# EAGLE board Remote Irbis (EAGLE 7.5.0)
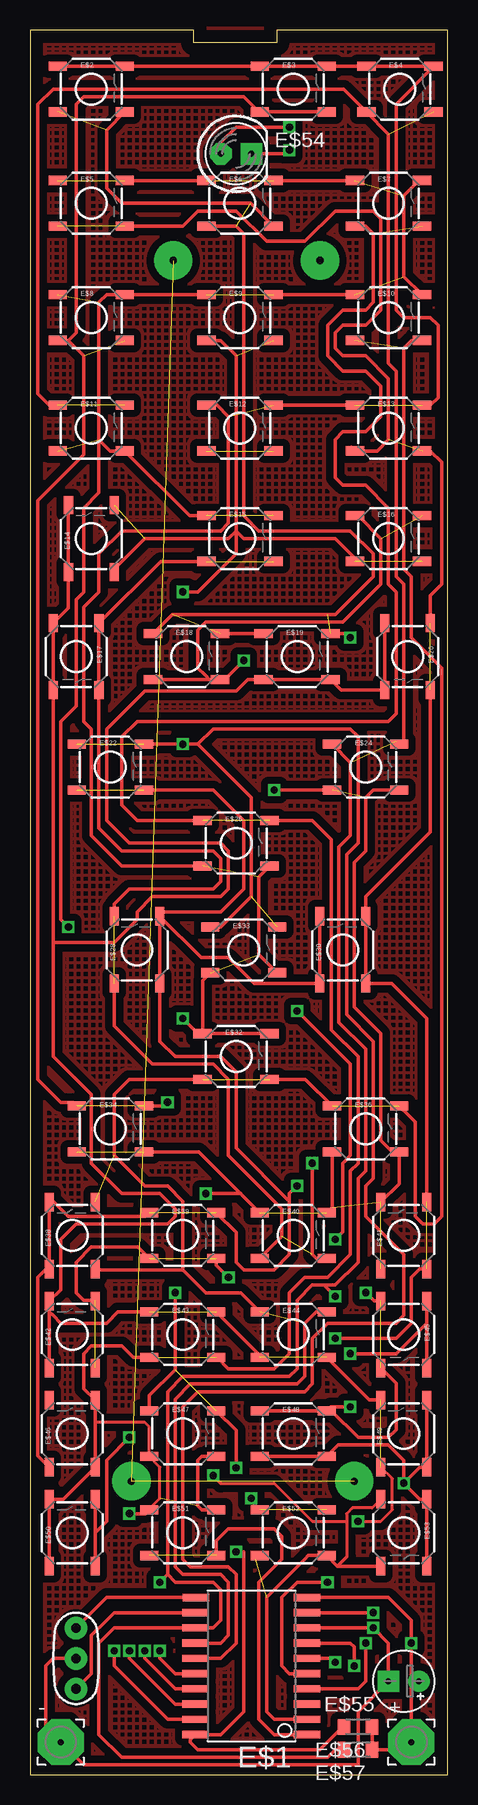
[diagram p0: board, top side]
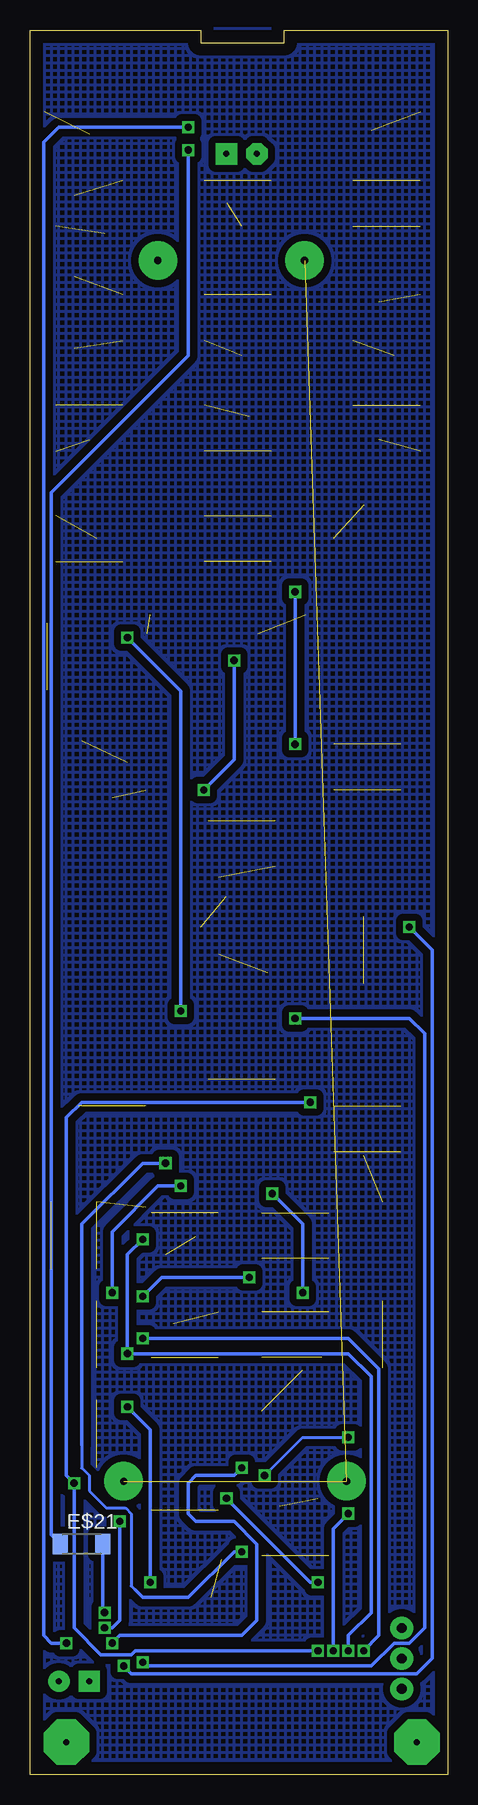
[diagram p1: board, bottom side, seen from below]

Size 34.82 x 145.44 mm. Coordinates in mm from the lower left corner, seen from the top.
Outline: 0,0 34.82,0
Outline: 34.82,0 34.82,145.44
Outline: 34.82,145.44 20.58,145.44
Outline: 20.58,145.44 20.58,144.36
Outline: 20.58,144.36 13.64,144.36
Outline: 13.64,144.36 13.64,145.44
Outline: 13.64,145.44 0,145.44
Outline: 0,145.44 0,0
Outline: 0,0 34.82,0
Outline: 34.82,0 34.82,145.44
Outline: 34.82,145.44 20.58,145.44
Outline: 20.58,145.44 20.58,144.36
Outline: 20.58,144.36 13.64,144.36
Outline: 13.64,144.36 13.64,145.44
Outline: 13.64,145.44 0,145.44
Outline: 0,145.44 0,0
Copper layers (1*16): Top 0.035mm / dielectric 1.5mm / Bottom 0.035mm
Design rules "default": minimum track width 10mil, minimum drill 24mil, track to track 8mil, track to pad 8mil, pad to pad 8mil, via to via 8mil, smd to smd 8mil, copper to edge 40mil, drill to drill 8mil, minimum pad ring 10mil, minimum via ring 8mil, stop-mask expansion 4mil, vias tented up to drill 0mil, thermal gap 10mil

## Footprints (pad centres in the part's own frame; a part is rotated, then mirrored left to right if it is on the bottom)
3,81/1,4 = drill 0.5 pad 3.81 octagon: 1 0,0
SO20L$ = smd 0.61 x 2.21: 1 -5.715,-4.636; 2 -4.445,-4.636; 3 -3.175,-4.636; 4 -1.905,-4.636; 5 -0.635,-4.636; 6 0.635,-4.636; 7 1.905,-4.636; 8 3.175,-4.636; 9 4.445,-4.636; 10 5.715,-4.636; 11 5.715,4.61; 12 4.445,4.636; 13 3.175,4.636; 14 1.905,4.636; 15 0.635,4.636; 16 -0.635,4.636; 17 -1.905,4.636; 18 -3.175,4.636; 19 -4.445,4.636; 20 -5.715,4.636
TACTILE-SWITCH-SMD = smd 1.524 x 0.762: 1 -2.794,1.905; 2 2.794,1.905; 3 -2.794,-1.905; 4 2.794,-1.905
R1206 = smd 1.25 x 1.7: 1 -1.775,0; 2 1.775,0
LED5MM = drill 0.5 pad 1.778 octagon: A -1.27,0 | drill 0.5 pad 1.778 square: K 1.27,0
E2,5-5 = drill 0.5 pad 1.778: + -1.27,0 | drill 0.5 pad 1.778 square: - 1.27,0
R0805 = smd 1.05 x 1.3: 1 -1.175,0; 2 1.175,0
RESONATOR-PTH = drill 0.8 pad 1.88: 1 -2.54,0; 2 0,0; 3 2.54,0

## Placement (x,y rotation side)
+  [3,81/1,4]  31.78,2.72 0 top
-  [3,81/1,4]  2.57,2.72 0 top
E$1  [SO20L$]  18.44,9.07 90 top
E$2  [TACTILE-SWITCH-SMD]  5.11,140.51 0 top
E$3  [TACTILE-SWITCH-SMD]  21.94,140.51 0 top
E$4  [TACTILE-SWITCH-SMD]  30.83,140.51 0 top
E$5  [TACTILE-SWITCH-SMD]  5.11,130.99 0 top
E$6  [TACTILE-SWITCH-SMD]  17.49,130.99 0 top
E$7  [TACTILE-SWITCH-SMD]  29.87,130.99 0 top
E$8  [TACTILE-SWITCH-SMD]  5.11,121.46 0 top
E$9  [TACTILE-SWITCH-SMD]  17.49,121.46 0 top
E$10  [TACTILE-SWITCH-SMD]  29.87,121.46 0 top
E$11  [TACTILE-SWITCH-SMD]  5.11,112.25 0 top
E$12  [TACTILE-SWITCH-SMD]  17.49,112.25 0 top
E$13  [TACTILE-SWITCH-SMD]  29.87,112.25 0 top
E$14  [TACTILE-SWITCH-SMD]  5.11,103.05 90 top
E$15  [TACTILE-SWITCH-SMD]  17.49,103.05 0 top
E$16  [TACTILE-SWITCH-SMD]  29.87,103.05 0 top
E$17  [TACTILE-SWITCH-SMD]  3.84,93.2 270 top
E$18  [TACTILE-SWITCH-SMD]  13.05,93.2 0 top
E$19  [TACTILE-SWITCH-SMD]  22.25,93.2 0 top
E$20  [TACTILE-SWITCH-SMD]  31.46,93.2 270 top
E$21  [R1206]  30.51,19.23 0 bottom
E$22  [TACTILE-SWITCH-SMD]  6.7,84 0 top
E$24  [TACTILE-SWITCH-SMD]  27.97,84 0 top
E$26  [TACTILE-SWITCH-SMD]  17.17,77.65 0 top
E$28  [TACTILE-SWITCH-SMD]  8.92,68.76 90 top
E$30  [TACTILE-SWITCH-SMD]  26.06,68.76 90 top
E$32  [TACTILE-SWITCH-SMD]  17.17,59.87 0 top
E$33  [TACTILE-SWITCH-SMD]  17.81,68.76 0 top
E$34  [TACTILE-SWITCH-SMD]  6.7,53.83 0 top
E$36  [TACTILE-SWITCH-SMD]  27.97,53.83 0 top
E$38  [TACTILE-SWITCH-SMD]  3.52,44.94 90 top
E$39  [TACTILE-SWITCH-SMD]  12.73,44.94 0 top
E$40  [TACTILE-SWITCH-SMD]  21.94,44.94 0 top
E$41  [TACTILE-SWITCH-SMD]  31.14,44.94 90 top
E$42  [TACTILE-SWITCH-SMD]  3.52,36.69 90 top
E$43  [TACTILE-SWITCH-SMD]  12.73,36.69 0 top
E$44  [TACTILE-SWITCH-SMD]  21.94,36.69 0 top
E$45  [TACTILE-SWITCH-SMD]  31.14,36.69 270 top
E$46  [TACTILE-SWITCH-SMD]  3.52,28.43 90 top
E$47  [TACTILE-SWITCH-SMD]  12.73,28.43 0 top
E$48  [TACTILE-SWITCH-SMD]  21.94,28.43 0 top
E$49  [TACTILE-SWITCH-SMD]  31.14,28.43 90 top
E$50  [TACTILE-SWITCH-SMD]  3.52,20.18 90 top
E$51  [TACTILE-SWITCH-SMD]  12.73,20.18 0 top
E$52  [TACTILE-SWITCH-SMD]  21.94,20.18 0 top
E$53  [TACTILE-SWITCH-SMD]  31.14,20.18 270 top
E$54  [LED5MM]  17.17,135.11 0 top
E$55  [E2,5-5]  31.14,7.8 180 top
E$56  100K  [R0805]  27.33,3.99 180 top
E$57  100K  [R0805]  27.33,2.08 180 top
E$59  [RESONATOR-PTH]  3.84,9.7 90 top

## Library data of the parts
+ - = wirepad
E$1 = avr-7
E$2-E$20 E$22 E$24 E$26 E$28 E$30 E$32-E$34 E$36 E$38-E$53 = SparkFun-Electromechanical
E$21 E$55-E$57 = rcl
E$54 = led
E$59 = SparkFun-FreqCtrl

## Nets
S$1: E$1.6 E$2.1 E$2.2 E$3.1 E$3.2 E$4.1 E$4.2 E$12.1 E$12.2 E$13.1 E$13.2 E$26.3 E$26.4 E$32.1 E$32.2 E$33.3 E$33.4
S$2: E$12.3 E$12.4
S$3: E$1.16 E$3.3 E$3.4 E$8.3 E$8.4 E$34.1 E$34.2 E$48.3 E$48.4 E$49.3 E$49.4 E$53.1 E$53.2
S$4: E$1.13 E$4.3 E$4.4 E$11.1 E$11.2 E$24.1 E$24.2 E$39.3 E$39.4 E$42.3 E$42.4 E$52.1 E$52.2 E$57.2
S$5: +.1 E$1.10 E$54.A E$55.+ E$56.1 E$57.1
S$6: E$1.19 E$5.3 E$5.4 E$13.3 E$13.4 E$20.1 E$20.2 E$30.3 E$30.4 E$41.3 E$41.4
S$7: E$1.18 E$2.3 E$2.4 E$6.3 E$6.4 E$18.1 E$18.2 E$19.1 E$19.2 E$45.1 E$45.2
S$8: E$1.17 E$7.3 E$7.4 E$26.1 E$26.2 E$43.3 E$43.4 E$46.3 E$46.4 E$47.3 E$47.4 E$50.1 E$50.2 E$51.1 E$51.2
S$9: E$1.7 E$5.1 E$5.2 E$6.1 E$6.2 E$7.1 E$7.2 E$8.1 E$8.2 E$9.1 E$9.2 E$10.1 E$10.2 E$11.3 E$11.4 E$15.1 E$15.2
S$10: E$1.15 E$9.3 E$9.4 E$14.3 E$14.4 E$16.3 E$16.4 E$22.1 E$22.2 E$33.1 E$33.2
S$11: E$21.1 E$54.K
S$12: -.1 E$1.8 E$14.1 E$14.2 E$17.3 E$17.4 E$19.3 E$19.4 E$20.3 E$20.4 E$42.1 E$42.2 E$43.1 E$43.2 E$44.3 E$44.4 E$49.1 E$49.2 E$55.- E$59.2
S$13: E$1.14 E$10.3 E$10.4 E$32.3 E$32.4 E$36.1 E$36.2 E$38.3 E$38.4 E$44.1 E$44.2
S$14: E$1.4 E$16.1 E$16.2 E$18.3 E$18.4 E$24.3 E$24.4 E$34.3 E$34.4 E$36.3 E$36.4 E$40.1 E$40.2 E$41.1 E$41.2 E$47.1 E$47.2
S$15: E$1.20 E$15.3 E$15.4 E$17.1 E$17.2 E$28.1 E$28.2 E$40.3 E$40.4 E$56.2
S$16: E$1.11 E$59.3
S$17: E$1.12 E$59.1
S$18: E$1.5 E$22.3 E$22.4 E$28.3 E$28.4 E$30.1 E$30.2 E$38.1 E$38.2 E$39.1 E$39.2 E$45.3 E$45.4 E$46.1 E$48.1 E$48.2
S$19: E$1.9 E$21.2
S$24: E$1.2 E$50.3 E$50.4 E$52.3 E$52.4 E$53.3 E$53.4
S$25: E$1.1 E$51.3 E$51.4

## Tracks (layer width: path | path; a pad name or v marks a point on that pad's centre or on a via)
S$1  (via drill 0.6)  (4 unrouted)
  Top 0.305: E$2.1 E$2.2 E$3.1 E$3.2 E$4.1 E$4.2 33.62,142.35 30.51,139.24 30.51,122.1 31.14,121.46 33.37,121.46 34,120.83 34,114.79 33.37,114.16 E$13.2 | E$13.1 E$12.2 | E$12.1 15.59,114.16 16.54,113.21 16.54,104.32 15.9,103.68 7.65,103.68 5.74,101.78 5.74,98.6 4.47,97.33 4.47,87.81 5.11,87.17 5.11,78.28 7.65,75.74 E$26.3 | E$26.4 19.08,74.85 19.08,68.38 E$33.4 | E$33.3 14.38,66.22 E$32.1 | E$32.1 14,61.77 v12.73,63.04 | v25.43,9.38 25.43,9.7 E$1.6 | E$32.2 E$32.1
  Bottom 0.305: v12.73,63.04 3.2,63.04 1.93,61.77 1.93,12.24 3.2,10.97 4.47,10.97 6.38,9.07 25.43,9.07 v25.43,9.38
S$2  (1 unrouted)
S$3  (via drill 0.6)  (2 unrouted)
  Top 0.305: 3.2,119.56 3.84,120.19 3.84,139.24 4.47,139.88 17.81,139.88 19.08,138.61 E$3.3 E$3.4 | 3.2,119.56 E$8.3 3.2,119.56 | 3.2,119.56 4.47,118.29 4.47,110.03 0.66,106.22 0.66,57.96 2.57,56.06 3.59,56.06 E$34.1 | E$34.2 11.14,55.74 v11.46,56.06 | v31.14,24.31 32.48,25.64 E$49.3 E$49.4 | v31.14,24.31 31.14,26.21 29.87,27.48 25.68,27.48 E$48.4 E$48.3 | E$1.16 12.09,8.43 10.82,9.7 v10.82,10.34 | v31.14,24.31 32.48,22.97 E$53.1 E$53.2
  Bottom 0.305: v11.46,56.06 30.51,56.06 31.78,54.79 31.78,24.94 v31.14,24.31 31.14,12.24 28.92,10.02 26.38,10.02 26.06,10.34 v10.82,10.34
S$4  (via drill 0.6)  (6 unrouted)
  Top 0.305: E$57.2 25.43,2.08 24.79,1.45 7.65,1.45 5.74,3.35 5.74,10.97 7.01,12.24 E$1.13 15.27,12.24 15.9,12.88 15.9,15.42 15.27,16.05 12.09,16.05 11.46,16.69 | E$24.1 26.7,84.38 26.7,78.28 25.75,77.33 25.75,62.72 27.97,60.5 27.97,50.34 27.33,49.71 27.33,42.72 25.43,40.82 24.48,40.82 | E$11.1 1.62,114.16 0.66,115.11 0.66,139.24 1.93,140.51 26.13,140.51 E$4.3 29.87,136.76 29.87,117.65 30.51,117.02 30.51,99.87 31.14,99.24 31.14,86.28 E$24.2 30.51,86.16 | E$39.3 8.98,43.99 5.11,43.99 3.84,42.72 3.84,40.18 4.47,39.55 5.36,39.55 E$42.4 | E$39.4 15.52,42.47 v16.54,41.45 | v25.43,39.86 24.48,40.82 | 24.48,40.82 23.52,40.82 22.25,39.55 22.25,33.83 21.62,33.2 12.73,33.2 11.46,31.93 11.46,16.69 | E$52.1 18.44,22.78 v18.44,23.04 | v10.82,16.05 11.46,16.69
  Bottom 0.305: v16.54,41.45 23.84,41.45 v25.43,39.86 | v18.44,23.04 11.46,16.05 v10.82,16.05
S$5  (via drill 0.6)
  Top 0.305: 31.78,7.16 31.78,3.99 +.1 31.14,2.08 E$57.1 E$56.1 | 31.78,7.16 E$55.+ | E$1.10 29.87,14.78 31.78,12.88 v31.78,10.97 31.78,7.16 | E$54.A 15.9,136.07 17.17,137.34 v21.62,137.34
  Bottom 0.305: v21.62,137.34 32.41,137.34 33.68,136.07 33.68,11.61 33.05,10.97 v31.78,10.97
S$6  (via drill 0.6)  (4 unrouted)
  Top 0.305: E$41.3 32.48,42.15 31.78,41.45 31.78,37.64 30.51,36.37 v25.43,36.37 | v7.01,10.34 7.01,9.07 11.46,4.62 E$1.19 | E$5.4 12.73,129.08 14,130.35 17.17,130.35 19.71,127.81 22.89,127.81 25.43,130.35 28.6,130.35 29.24,129.72 29.24,122.1 27.97,120.83 26.06,120.83 25.43,120.19 25.43,118.92 26.06,118.29 27.97,118.29 29.87,116.38 29.87,111.3 28.92,110.35 E$13.3 26.76,110.67 | E$13.4 33.37,110.35 34.32,109.4 34.32,99.24 33.37,98.28 E$20.1 | E$20.2 33.37,78.6 27.97,73.2 E$30.4 E$30.3 30.13,65.96 33.05,63.04 E$41.4
  Bottom 0.305: v25.43,36.37 8.28,36.37 5.74,33.83 5.74,11.61 v7.01,10.34
S$7  (via drill 0.6)  (4 unrouted)
  Top 0.305: E$6.3 15.27,129.08 17.17,129.08 17.81,128.45 17.81,104.95 19.08,103.68 26.7,103.68 28.6,101.78 28.6,99.87 25.43,96.7 24.79,96.7 11.84,96.7 E$18.1 | E$19.2 26.38,95.11 v26.7,94.79 | v26.7,35.1 30.51,35.1 33.05,37.64 E$45.1 E$45.2 | E$1.18 12.09,5.89 8.28,9.7 v8.28,10.34 | 8.28,138.61 E$2.4 6.38,137.08 6.38,133.53 6.38,132.26 7.65,130.99 18.38,130.99 E$6.4 | E$19.1 E$18.2 | v25.43,44.63 26.06,45.26 26.06,50.98 26.7,51.61 26.7,59.23 v22.25,63.68
  Bottom 0.305: v8.28,10.34 8.28,11.61 6.38,13.51 6.38,33.2 8.28,35.1 v26.7,35.1 26.7,36.37 26.7,43.36 v25.43,44.63 | v22.25,63.68 22.25,90.35 v26.7,94.79
S$8  (via drill 0.6)  (4 unrouted)
  Top 0.254: E$51.1 9.94,22.15 10.82,23.04 10.82,25.64 E$47.3 9.94,29.01 9.55,29.39 5.43,29.39
  Top 0.305: E$26.1 8.92,79.55 7.65,80.82 7.65,86.54 8.92,87.81 26.7,87.81 29.87,87.81 30.51,88.44 30.51,98.6 29.87,99.24 29.87,105.59 27.97,107.49 26.06,107.49 25.43,108.13 25.43,111.3 26.06,111.94 27.97,111.94 29.24,113.21 29.24,115.75 27.97,117.02 26.06,117.02 24.79,118.29 24.79,120.83 26.06,122.1 27.97,122.1 28.6,122.73 28.6,128.45 27.97,129.08 E$7.3 | 10.51,34.78 E$43.3 8.6,34.78 7.65,35.74 5.11,35.74 4.47,35.1 4.47,32.18 E$46.4 5.43,29.39 E$46.3 2.76,22.97 E$50.2 E$50.1 | E$26.2 23.52,79.55 25.11,77.96 25.11,62.09 27.33,59.87 27.33,50.98 26.7,50.34 26.7,45.9 26.7,43.36 24.79,41.45 22.89,41.45 21.62,40.18 21.62,35.1 20.98,34.47 20.35,33.83 16.54,33.83 15.59,34.78 E$43.4 | E$1.17 12.09,7.16 9.55,9.7 v9.55,10.34 | v8.28,21.77 8.92,21.77 9.62,21.77 E$51.1 | E$47.4 14.32,26.53 14,26.21 14,22.4 14.32,22.08 E$51.2
  Bottom 0.305: v9.55,10.34 9.55,20.5 v8.28,21.77
S$9  (via drill 0.6)  (8 unrouted)
  Top 0.305: E$10.1 E$9.2 | E$9.1 E$8.2 6.38,123.37 5.74,122.73 5.74,111.3 | 5.74,111.3 6.7,110.35 E$11.4 13.3,104.95 E$15.1 | 5.74,111.3 5.74,106.86 4.47,105.59 4.47,98.6 3.84,97.97 3.84,89.08 2.57,87.81 2.57,71.3 v3.2,70.66 | v27.02,9.07 27.02,10.65 26.7,10.97 E$1.7 | E$6.2 E$7.1 | E$5.2 E$6.1 | E$7.2 32.41,132.89 31.14,131.62 31.14,124.89 E$10.2
  Bottom 0.305: v3.2,70.66 1.3,68.76 1.3,9.7 2.57,8.43 26.38,8.43 v27.02,9.07
S$10  (via drill 0.6)  (5 unrouted)
  Top 0.305: v12.73,85.9 E$22.2 v12.73,85.9 | v12.73,85.9 14,85.9 | 14,85.9 18.44,81.46 18.44,73.2 15.9,70.66 E$33.1 | 14,85.9 15.27,87.17 26.7,87.17 27.33,86.54 27.33,77.65 26.38,76.69 26.38,63.36 28.6,61.14 28.6,49.71 27.97,49.07 27.97,46.53 31.14,43.36 31.14,38.28 30.51,37.64 24.79,37.64 23.52,36.37 23.52,32.56 22.89,31.93 14,31.93 12.73,30.66 12.73,17.96 13.36,17.32 16.54,17.32 17.17,16.69 17.17,15.42 17.17,10.97 15.9,9.7 E$1.15 | E$16.3 27.08,101.4 25.43,103.05 17.81,103.05 17.17,103.68 | E$9.3 15.9,119.56 17.17,118.29 17.17,103.68 | 17.17,103.68 16.54,103.05 9.55,103.05 7.01,100.51 E$14.3 | v12.73,98.6 14,98.6 17.17,101.78 17.17,103.68
  Bottom 0.305: v12.73,85.9 v12.73,98.6
S$11  (via drill 0.6)
  Top 0.305: E$54.K 21.3,135.11 v21.62,135.43
  Bottom 0.305: v21.62,135.43 21.62,118.29 33.05,106.86 33.05,21.77 33.05,19.99 E$21.1
S$12  (via drill 0.6)  (3 unrouted)
  Top 0.254: v27.33,21.13 29.24,21.13 30.19,22.08 30.19,24.69 E$49.1
  Top 0.305: E$59.2 1.93,9.7 1.3,9.07 1.3,7.16 1.3,3.99 -.1 4.47,0.81 27.33,0.81 27.33,1.45 27.33,5.26 E$55.- 29.87,10.97 v28.6,12.24 | E$1.8 23.52,12.24 | 23.52,12.24 v28.6,12.24 | E$14.2 E$14.1 3.2,97.27 E$17.3 E$17.4 1.93,73.2 1.93,69.39 | 1.93,69.39 1.93,68.76 1.93,59.87 5.11,56.69 5.11,50.98 7.65,48.44 8.28,48.44 10.82,48.44 12.09,47.17 12.09,46.53 11.46,45.9 3.84,45.9 2.57,44.63 2.57,40.44 E$42.2 1.62,38.91 | E$43.1 7.33,38.59 6.38,37.64 2.57,37.64 1.93,38.28 1.62,38.59 1.62,38.91 | E$43.2 19.14,34.97 E$44.3 | 1.93,69.39 7.01,69.39 8.92,71.3 8.92,71.93 10.19,73.2 15.9,73.2 16.54,73.84 16.54,77.01 15.9,77.65 8.28,77.65 6.38,79.55 6.38,87.17 9.55,90.35 17.17,90.35 18.13,91.3 E$19.3 E$19.4 25.94,90.41 E$20.4 E$20.3 | E$49.2 28.29,31.23 E$44.4 | v28.6,12.24 23.52,12.24 | E$42.1 1.62,38.91
  Bottom 0.305: v27.33,21.13 27.33,12.88 27.97,12.24 v28.6,12.24
S$13  (5 unrouted)
  Top 0.305: 5.43,42.4 E$38.3 5.49,42.09 12.73,42.09 | 12.73,42.09 14.63,40.18 17.17,40.18 17.56,40.18 E$44.1 | E$32.3 8.28,57.96 7.01,56.69 7.01,51.61 9.55,49.07 11.46,49.07 12.73,47.8 12.73,42.09 | E$36.1 22.95,57.96 E$32.4 | E$10.4 31.78,119.56 31.14,118.92 31.14,100.51 31.78,99.87 31.78,94.79 34.32,92.25 34.32,56.06 34.32,46.53 33.68,45.9 32.73,45.9 32.1,46.53 32.1,54.41 E$36.2 31.08,55.42 | E$44.2 23.84,38.59 22.89,37.64 22.89,33.2 22.25,32.56 13.36,32.56 12.09,31.29 12.09,17.32 12.73,16.69 15.9,16.69 16.54,16.05 16.54,11.61 15.9,10.97 E$1.14
S$14  (via drill 0.6)  (7 unrouted)
  Top 0.305: E$16.1 27.33,104.95 29.24,103.05 29.24,99.24 26.06,96.06 14.63,96.06 14,95.43 14,92.25 14.63,91.62 14.95,91.3 E$18.4 | E$18.4 16.22,91.3 v17.81,92.89 | v20.35,82.09 E$24.3 | E$24.4 28.6,82.09 27.97,81.46 27.97,77.01 27.02,76.06 27.02,63.99 29.24,61.77 29.24,52.88 29.87,52.25 30.19,51.93 E$36.4 30.76,49.26 E$41.2 | E$34.4 14.06,51.93 17.68,48.31 | 17.68,48.31 E$40.1 | E$40.2 25.18,47.29 E$36.3 | v12.09,40.18 12.09,33.77 9.94,31.61 E$47.1 | v14.63,48.44 17.56,48.44 17.68,48.31 | E$47.2 17.17,28.69 v17.17,25.58 | v27.97,10.97 27.97,8.11 27.97,7.8 27.33,7.16 E$1.4 | E$18.3 E$18.4
  Bottom 0.305: v17.81,92.89 17.81,84.63 v20.35,82.09 | v12.09,40.18 12.09,45.9 v14.63,48.44 | v17.17,25.58 17.81,24.94 20.35,24.94 20.98,24.94 21.62,24.31 21.62,21.77 20.98,21.13 17.81,21.13 15.9,19.23 15.9,12.88 17.17,11.61 25.43,11.61 27.33,11.61 v27.97,10.97
S$15  (via drill 0.6)  (3 unrouted)
  Top 0.305: E$56.2 26.06,3.99 24.16,2.08 14,2.08 13.36,2.72 13.36,2.91 E$1.20 15.9,3.35 17.81,5.26 17.81,14.78 17.81,18.59 | E$15.3 10.89,101.14 E$17.1 E$17.2 5.74,78.92 7.65,77.01 15.27,77.01 15.9,76.38 15.9,74.47 15.27,73.84 8.28,73.84 7.01,72.57 E$28.2 | E$28.1 7.01,62.41 10.19,59.23 15.27,59.23 16.54,57.96 16.54,51.61 20.98,47.17 20.98,44.88 E$40.3 | E$40.4 23.84,43.04 23.52,43.36 v23.52,50.98 | 17.81,18.59 v17.17,18.59 17.81,18.59
  Bottom 0.254: 30.51,27.48 30.51,25.58 29.87,24.94 29.87,23.67 28.45,22.24 26.86,22.24 26.38,21.77 26.38,15.73 26.06,15.42
  Bottom 0.305: v23.52,50.98 25.43,50.98 30.51,45.9 30.51,27.48 | 26.06,15.42 25.43,14.78 21.62,14.78 17.81,18.59 v17.17,18.59
S$16
  Top 0.305: E$59.3 6.38,14.78 E$1.11
S$17
  Top 0.305: E$59.1 5.11,8.43 5.11,11.61 6.38,12.88 7.01,13.51 E$1.12
S$18  (via drill 0.6)  (3 unrouted)
  Top 0.305: E$22.4 15.27,82.09 17.81,79.55 17.81,73.84 15.9,71.93 11.21,71.93 E$28.4 | E$28.4 14.25,68.12 16.54,68.12 18.7,65.96 E$30.1 E$30.2 | 21.62,47.8 17.17,52.25 17.17,58.6 15.9,59.87 12.09,59.87 10.82,61.14 E$28.3 E$28.4 | 21.62,47.8 21.62,43.36 20.35,42.09 17.81,42.09 17.17,42.72 17.17,45.2 E$39.2 | E$39.1 9.62,46.53 3.2,46.53 2,47.74 E$38.2 E$38.1 1.36,42.15 0.66,41.45 0.66,26.59 E$46.1 | E$45.3 28.67,39.48 v27.97,40.18 | v22.25,49.07 21.62,48.44 21.62,47.8 | E$48.2 25.11,30.34 27.33,28.12 29.87,28.12 30.51,28.75 30.51,32.63 E$45.4 | E$48.2 25.05,30.66 v26.7,30.66 | v24.79,16.05 22.25,16.05 20.98,14.78 20.98,9.07 21.62,8.43 E$1.5 | E$48.2 E$48.1
  Bottom 0.305: v27.97,40.18 27.97,45.26 24.16,49.07 v22.25,49.07 | v26.7,30.66 24.79,28.75 v24.79,16.05
S$19  (via drill 0.6)
  Top 0.305: v28.6,13.51 E$1.9
  Bottom 0.305: E$21.2 28.73,13.64 v28.6,13.51
S$20
  pour Top (isolate 0.61, hatched): 0.03,0.18 34.95,0.18 34.95,145.59 0.03,145.59
S$21
  pour Bottom (isolate 0.61, hatched): 0.03,-0.46 34.95,-0.46 34.95,145.59 0.03,145.59
S$22  (via drill 0.6 pad 3.2)  (2 unrouted)
  other vias: 11.94,126.22 8.44,24.47 27.02,24.47
S$23  (via drill 0.6 pad 3.2)
  other vias: 24.16,126.22
S$24  (via drill 0.6)  (1 unrouted)
  Top 0.254: E$53.3 28.51,22.24 26.86,22.24 26.38,21.77 26.38,21.13 | 26.38,21.13 26.38,18.15 | 15.9,24.31 20.35,24.31 23.52,21.13 26.38,21.13
  Top 0.305: E$53.4 25.62,17.39 | 25.62,17.39 E$52.4 23.21,18.27 22.89,17.96 19.71,14.78 19.71,5.26 20.35,4.62 E$1.2 | E$50.3 5.43,19.86 | 5.43,19.86 5.43,20.18 6.38,21.13 6.38,26.21 v8.28,28.12 | 18.83,17.96 E$52.3 | v15.27,24.94 15.9,24.31 | 26.38,18.15 25.62,17.39 | E$50.4 5.43,19.86
  Bottom 0.254: v15.27,24.94 12.09,28.12 v8.28,28.12
S$25  (1 unrouted)
  Top 0.305: E$1.1 20.35,3.35 19.08,4.62 19.08,13.51 19.08,16.05 20.98,17.96 20.98,19.86 20.35,20.5 16.54,20.5 15.9,19.86 15.52,19.48 E$51.4